# Altium PCB NeuroMother_A.PcbDoc (part 3 of 3)
Units mil, origin at the board's own origin, x right, y up, seen from the top; angles counter-clockwise.
Board outline 11995 x 18500 mil, 2 copper layers (Top Layer, Bottom Layer); 186 components, 92 nets, 510 pads, 3972 vias.
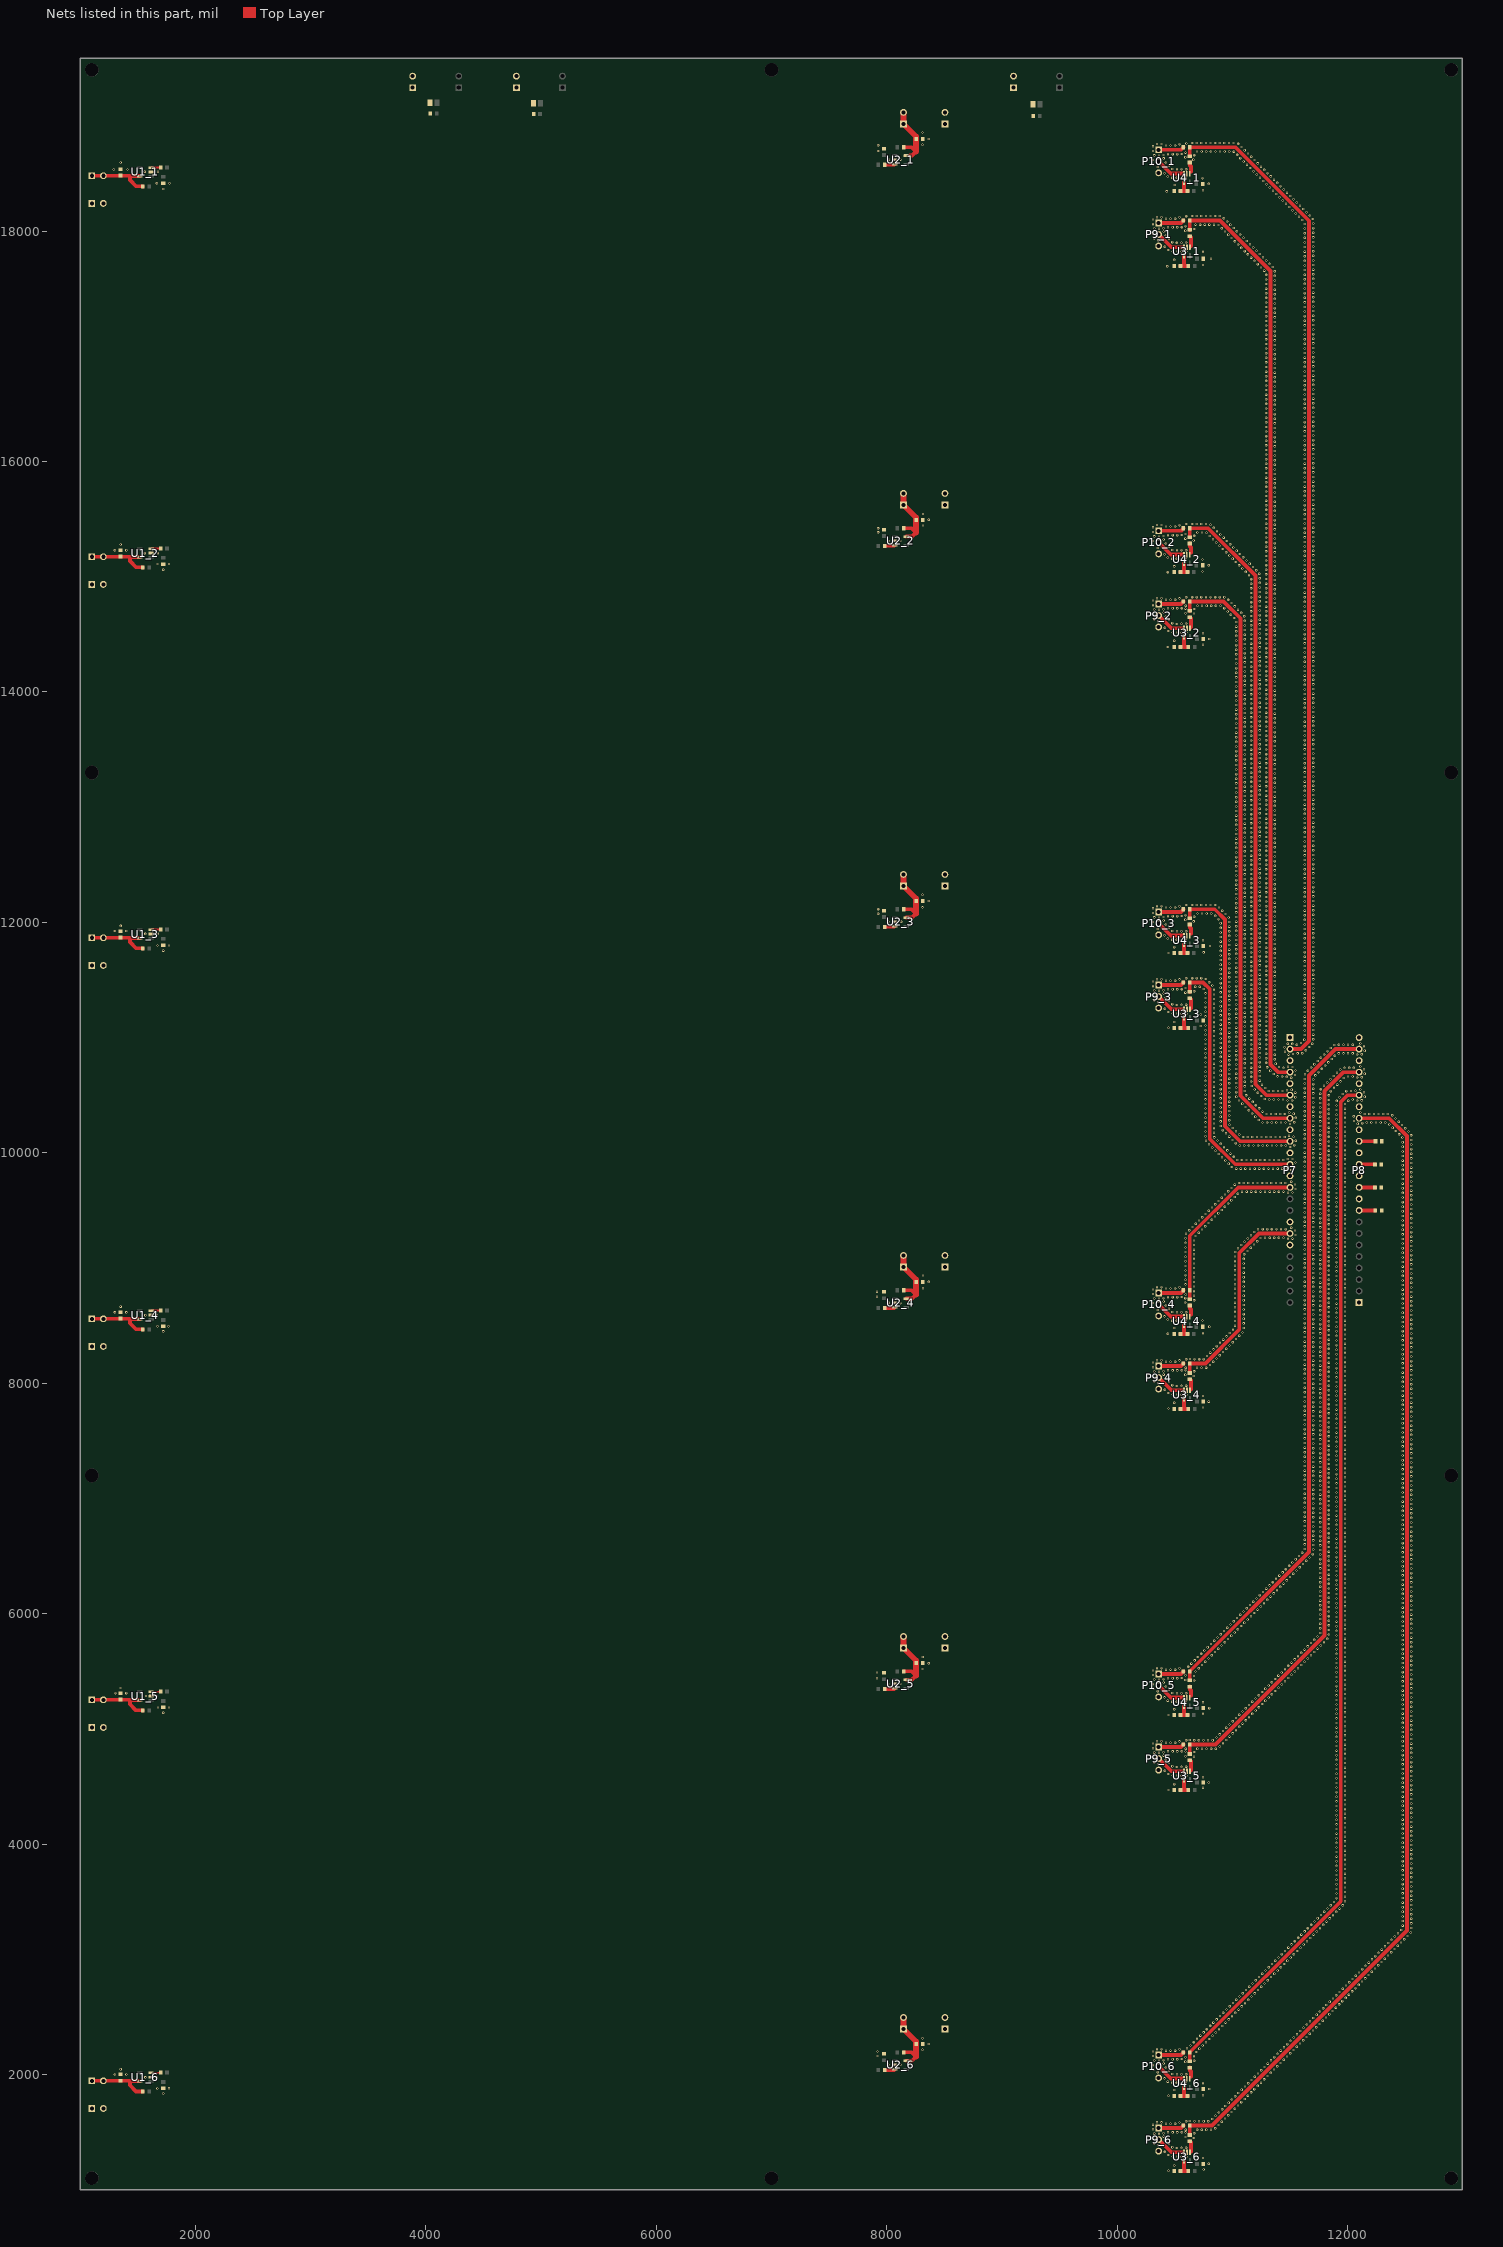
[diagram p3: the nets of this part, all layers, seen from the top]

## Via types
v1: diameter 20, hole 10, Top Layer to Bottom Layer, tented both sides, 3972 vias

## Nets (pads, with @x,y where several pads share a name; then routed paths per layer and width w, separated by ;. In a path a pad name is that pad's centre, name@x,y a point inside that pad or via, vN(x,y) a via of type N, cw(c..) or ccw(c..) an arc to the next point about the centre after c; other vN are vias at no path point) (continued)
GND: (continued)
  other v1: 11627.78,12381.73 11702.22,12385.62 11237.22,12386.68 11032.78,12406.58 11367.22,12411.5 11107.22,12416.87 11162.78,12419.28 11292.78,12420.37 11627.78,12421.73 11702.22,12425.62 11237.22,12426.68 11032.78,12446.58 11367.22,12451.5 11107.22,12456.87 11162.78,12459.28 11292.78,12460.37 11627.78,12461.73 11702.22,12465.62 11237.22,12466.68 11032.78,12486.58 11367.22,12491.5 11107.22,12496.87 11162.78,12499.28 11292.78,12500.37 11627.78,12501.73 11702.22,12505.62 11237.22,12506.68 11032.78,12526.58 11367.22,12531.5 11107.22,12536.87 11162.78,12539.28 11292.78,12540.37 11627.78,12541.73 11702.22,12545.62 11237.22,12546.68 11032.78,12566.58 11367.22,12571.5 11107.22,12576.87 11162.78,12579.28 11292.78,12580.37 11627.78,12581.73 11702.22,12585.62 11237.22,12586.68 11032.78,12606.58 11367.22,12611.5 11107.22,12616.87 11162.78,12619.28 11292.78,12620.37 11627.78,12621.73 11702.22,12625.62 11237.22,12626.68 11032.78,12646.58 11367.22,12651.5 11107.22,12656.87 11162.78,12659.28 11292.78,12660.37 11627.78,12661.73 11702.22,12665.62 11237.22,12666.68 11032.78,12686.58 11367.22,12691.5 11107.22,12696.87 11162.78,12699.28 11292.78,12700.37 11627.78,12701.73 11702.22,12705.62 11237.22,12706.68 11032.78,12726.58 11367.22,12731.5 11107.22,12736.87 11162.78,12739.28 11292.78,12740.37 11627.78,12741.73 11702.22,12745.62 11237.22,12746.68 11032.78,12766.58 11367.22,12771.5 11107.22,12776.87 11162.78,12779.28 11292.78,12780.37 11627.78,12781.73 11702.22,12785.62 11237.22,12786.68 11032.78,12806.58 11367.22,12811.5 11107.22,12816.87 11162.78,12819.28 11292.78,12820.37 11627.78,12821.73 11702.22,12825.62 11237.22,12826.68 11032.78,12846.58 11367.22,12851.5 11107.22,12856.87 11162.78,12859.28 11292.78,12860.37 11627.78,12861.73 11702.22,12865.62 11237.22,12866.68 11032.78,12886.58 11367.22,12891.5 11107.22,12896.87 11162.78,12899.28 11292.78,12900.37 11627.78,12901.73 11702.22,12905.62 11237.22,12906.68 11032.78,12926.58 11367.22,12931.5 11107.22,12936.87 11162.78,12939.28 11292.78,12940.37 11627.78,12941.73 11702.22,12945.62 11237.22,12946.68 11032.78,12966.58 11367.22,12971.5 11107.22,12976.87 11162.78,12979.28 11292.78,12980.37 11627.78,12981.73 11702.22,12985.62 11237.22,12986.68 11032.78,13006.58 11367.22,13011.5 11107.22,13016.87 11162.78,13019.28 11292.78,13020.37 11627.78,13021.73 11702.22,13025.62 11237.22,13026.68 11032.78,13046.58 11367.22,13051.5 11107.22,13056.87 11162.78,13059.28 11292.78,13060.37 11627.78,13061.73 11702.22,13065.62 11237.22,13066.68 11032.78,13086.58 11367.22,13091.5 11107.22,13096.87 11162.78,13099.28 11292.78,13100.37 11627.78,13101.73 11702.22,13105.62 11237.22,13106.68 11032.78,13126.58 11367.22,13131.5 11107.22,13136.87 11162.78,13139.28 11292.78,13140.37 11627.78,13141.73 11702.22,13145.62 11237.22,13146.68 11032.78,13166.58 11367.22,13171.5 11107.22,13176.87 11162.78,13179.28 11292.78,13180.37 11627.78,13181.73 11702.22,13185.62 11237.22,13186.68 11032.78,13206.58 11367.22,13211.5 11107.22,13216.87 11162.78,13219.28 11292.78,13220.37 11627.78,13221.73 11702.22,13225.62 11237.22,13226.68 11032.78,13246.58 11367.22,13251.5 11107.22,13256.87 11162.78,13259.28 11292.78,13260.37 11627.78,13261.73 11702.22,13265.62 11237.22,13266.68 11032.78,13286.58 11367.22,13291.5 11107.22,13296.87 11162.78,13299.28 11292.78,13300.37 11627.78,13301.73 11702.22,13305.62 11237.22,13306.68 11032.78,13326.58 11367.22,13331.5 11107.22,13336.87 11162.78,13339.28 11292.78,13340.37 11627.78,13341.73 11702.22,13345.62 11237.22,13346.68 11032.78,13366.58 11367.22,13371.5 11107.22,13376.87 11162.78,13379.28 11292.78,13380.37 11627.78,13381.73 11702.22,13385.62 11237.22,13386.68 11032.78,13406.58 11367.22,13411.5 11107.22,13416.87 11162.78,13419.28 11292.78,13420.37 11627.78,13421.73 11702.22,13425.62 11237.22,13426.68 11032.78,13446.58 11367.22,13451.5 11107.22,13456.87 11162.78,13459.28 11292.78,13460.37 11627.78,13461.73 11702.22,13465.62 11237.22,13466.68 11032.78,13486.58 11367.22,13491.5 11107.22,13496.87 11162.78,13499.28 11292.78,13500.37 11627.78,13501.73 11702.22,13505.62 11237.22,13506.68 11032.78,13526.58 11367.22,13531.5 11107.22,13536.87 11162.78,13539.28 11292.78,13540.37 11627.78,13541.73 11702.22,13545.62 11237.22,13546.68 11032.78,13566.58 11367.22,13571.5 11107.22,13576.87 11162.78,13579.28 11292.78,13580.37 11627.78,13581.73 11702.22,13585.62 11237.22,13586.68 11032.78,13606.58 11367.22,13611.5 11107.22,13616.87 11162.78,13619.28 11292.78,13620.37 11627.78,13621.73 11702.22,13625.62 11237.22,13626.68 11032.78,13646.58 11367.22,13651.5 11107.22,13656.87 11162.78,13659.28 11292.78,13660.37 11627.78,13661.73 11702.22,13665.62 11237.22,13666.68 11032.78,13686.58 11367.22,13691.5 11107.22,13696.87 11162.78,13699.28 11292.78,13700.37 11627.78,13701.73 11702.22,13705.62 11237.22,13706.68 11032.78,13726.58 11367.22,13731.5 11107.22,13736.87 11162.78,13739.28 11292.78,13740.37 11627.78,13741.73 11702.22,13745.62 11237.22,13746.68 11032.78,13766.58 11367.22,13771.5 11107.22,13776.87 11162.78,13779.28 11292.78,13780.37 11627.78,13781.73 11702.22,13785.62 11237.22,13786.68 11032.78,13806.58 11367.22,13811.5 11107.22,13816.87 11162.78,13819.28 11292.78,13820.37 11627.78,13821.73 11702.22,13825.62 11237.22,13826.68 11032.78,13846.58 11367.22,13851.5 11107.22,13856.87 11162.78,13859.28 11292.78,13860.37 11627.78,13861.73 11702.22,13865.62 11237.22,13866.68 11032.78,13886.58 11367.22,13891.5 11107.22,13896.87 11162.78,13899.28 11292.78,13900.37 11627.78,13901.73 11702.22,13905.62 11237.22,13906.68 11032.78,13926.58 11367.22,13931.5 11107.22,13936.87 11162.78,13939.28 11292.78,13940.37 11627.78,13941.73 11702.22,13945.62 11237.22,13946.68 11032.78,13966.58 11367.22,13971.5 11107.22,13976.87 11162.78,13979.28 11292.78,13980.37 11627.78,13981.73 11702.22,13985.62 11237.22,13986.68 11032.78,14006.58 11367.22,14011.5 11107.22,14016.87 11162.78,14019.28 11292.78,14020.37 11627.78,14021.73 11702.22,14025.62 11237.22,14026.68 11032.78,14046.58 11367.22,14051.5 11107.22,14056.87 11162.78,14059.28 11292.78,14060.37 11627.78,14061.73 11702.22,14065.62 11237.22,14066.68 11032.78,14086.58 11367.22,14091.5 11107.22,14096.87 11162.78,14099.28 11292.78,14100.37 11627.78,14101.73 11702.22,14105.62 11237.22,14106.68 11032.78,14126.58 11367.22,14131.5 11107.22,14136.87 11162.78,14139.28 11292.78,14140.37 11627.78,14141.73 11702.22,14145.62 11237.22,14146.68 11032.78,14166.58 11367.22,14171.5 11107.22,14176.87 11162.78,14179.28 11292.78,14180.37 11627.78,14181.73 11702.22,14185.62 11237.22,14186.68 11032.78,14206.58 11367.22,14211.5 11107.22,14216.87 11162.78,14219.28 11292.78,14220.37 11627.78,14221.73 11702.22,14225.62 11237.22,14226.68 11032.78,14246.58 11367.22,14251.5 11107.22,14256.87 11162.78,14259.28 11292.78,14260.37 11627.78,14261.73 11702.22,14265.62 11237.22,14266.68 11032.78,14286.58 11367.22,14291.5 11107.22,14296.87 11162.78,14299.28 11292.78,14300.37 11627.78,14301.73 11702.22,14305.62 11237.22,14306.68 11032.78,14326.58 11367.22,14331.5 11107.22,14336.87 11162.78,14339.28 11292.78,14340.37 11627.78,14341.73 11702.22,14345.62 11237.22,14346.68 11032.78,14366.58 11367.22,14371.5 11107.22,14376.87 11162.78,14379.28 11292.78,14380.37 11627.78,14381.73 11702.22,14385.62 11237.22,14386.68 10440,14390 11032.78,14406.58 10745,14410 11367.22,14411.5 11107.22,14416.87 11162.78,14419.28 11292.78,14420.37 11627.78,14421.73 11702.22,14425.62 11237.22,14426.68 10495,14445 11032.78,14446.58 11367.22,14451.5 11107.22,14456.87 11162.78,14459.28 10800,14460 11292.78,14460.37 11627.78,14461.73 11702.22,14465.62 11237.22,14466.68 11032.78,14486.58 11367.22,14491.5 11107.22,14496.87 11162.78,14499.28 11292.78,14500.37 11627.78,14501.73 11702.22,14505.62 11237.22,14506.68 10745,14510 10559.7,14514.96 10599.69,14515.34 10479.71,14516.18 10519.71,14516.18 11032.78,14526.58 10441.81,14528.96 11367.22,14531.5 11107.22,14536.87 11162.78,14539.28 11292.78,14540.37 11627.78,14541.73 11702.22,14545.62 11237.22,14546.68 10413.53,14557.24 11032.78,14566.58 11367.22,14571.5 11107.22,14576.87 11162.78,14579.28 11292.78,14580.37 11627.78,14581.73 11702.22,14585.62 11237.22,14586.68 10518.08,14590.62 10558.07,14591.47 10598.03,14593.28 10478.66,14597.37 11032.78,14606.58 11367.22,14611.5 10356.64,14613.49 11107.22,14616.87 11162.78,14619.28 11292.78,14620.37 11627.78,14621.73 10450.37,14625.66 11702.22,14625.62 11237.22,14626.68 10321.18,14631.99 11014.97,14642.4 11367.22,14651.5 10422.09,14653.94 11102.96,14656.65 11162.78,14659.28 11292.78,14660.37 11627.78,14661.73 11702.22,14665.62 11237.22,14666.68 10310.59,14670.57 10986.69,14670.68 10666.72,14680.77 10592.81,14683.15 11076.23,14686.4 10402.82,14688.99 11367.22,14691.5 10958.4,14698.97 11162.78,14699.28 11292.78,14700.37 11627.78,14701.73 11702.22,14705.62 11237.22,14706.68 10362.15,14713.48 10322.19,14715.35 11047.95,14714.68 10401.88,14718.07 10667.81,14720.75 10592.66,14723.15 10441.05,14726.18 10481.05,14726.18 10521.05,14726.18 10561.03,14727.43 10930.12,14727.25 11367.22,14731.5 11162.78,14739.28 11292.78,14740.37 11627.78,14741.73 11019.66,14742.97 11702.22,14745.62 11237.22,14746.68 10594.91,14748.7 10696.39,14748.74 10736.39,14748.74 10776.39,14748.74 10816.39,14748.74 10856.39,14748.74 10896.39,14748.74 10310.08,14753.47 10991.38,14771.25 11367.22,14771.5 11162.78,14779.28 11292.78,14780.37 11627.78,14781.73 11702.22,14785.62 11237.22,14786.68 10310.19,14793.47 10963.09,14799.54 10422.85,14800.62 10462.85,14800.62 10502.85,14800.62 11367.22,14811.5 10344.92,14813.32 10384.92,14813.32 10541.02,14812.57 11162.78,14819.28 11292.78,14820.37 10930.23,14822.34 11627.78,14821.73 10598.43,14822.52 10650.24,14823.17 10690.24,14823.17 10730.24,14823.17 10770.24,14823.17 10810.24,14823.17 10850.24,14823.17 10890.24,14823.17 11702.22,14825.62 11237.22,14826.68 11367.22,14851.5 11162.78,14859.28 11292.78,14860.37 11627.78,14861.73 11702.22,14865.62 11237.22,14866.68 11367.22,14891.5 11162.78,14899.28 11292.78,14900.37 11627.78,14901.73 11702.22,14905.62 11237.22,14906.68 11367.22,14931.5 11162.78,14939.28 11292.78,14940.37 11627.78,14941.73 11702.22,14945.62 11237.22,14946.68 11367.22,14971.5 11162.78,14979.28 11292.78,14980.37 11627.78,14981.73 11702.22,14985.62 11237.22,14986.68 11367.22,15011.5 11143.21,15014.16 11292.78,15020.37 11627.78,15021.73 11233.04,15026.46 11702.22,15025.62 10440,15040 11114.92,15042.45 10740,15045 11367.22,15051.5 11206.36,15056.27 1720,15060 11292.78,15060.37 11627.78,15061.73 11702.22,15065.62 11086.64,15070.73 11178.08,15084.55 10495,15090 11367.22,15091.5 11058.35,15099.02 10795,15100 11292.78,15100.37 11627.78,15101.73 11702.22,15105.62 1670,15110 1770,15110 11149.79,15112.84 11030.07,15127.3 11367.22,15131.5 11292.78,15140.37 11121.51,15141.12 11627.78,15141.73 11702.22,15145.62 10740,15150 10597.91,15152.34 10557.93,15153.54 10478.02,15156.18 10518.02,15156.18 11001.78,15155.59 10439.4,15166.61 11093.22,15169.41 11367.22,15171.5 11292.78,15180.37 11627.78,15181.73 10973.5,15183.87 11702.22,15185.62 10411,15194.77 11064.94,15197.69 1560,15205 1675,15205 11367.22,15211.5 10945.22,15212.15 11292.78,15220.37 11627.78,15221.73 11036.65,15225.98 11702.22,15225.62 1300,15230 1400,15230 10598.62,15230.29 10518.62,15230.62 10558.62,15230.62 10478.66,15232.37 10916.93,15240.44 10352.32,15249.06 11367.22,15251.5 11008.37,15254.26 11292.78,15260.37 10450.37,15260.66 11627.78,15261.73 11702.22,15265.62 10888.65,15268.72 10318.52,15270.46 1350,15280 10980.09,15282.54 10422.09,15288.94 11367.22,15291.5 10860.36,15297.01 11292.78,15300.37 11627.78,15301.73 11702.22,15305.62 8020,15310 8120,15310 10311.37,15309.81 10951.8,15310.83 10663.2,15314.95 10402.82,15323.99 10832.08,15325.29 10591.89,15330.98 11367.22,15331.5 10923.52,15339.11 11292.78,15340.37 11627.78,15341.73 11702.22,15345.62 10362.15,15348.48 10322.19,15350.35 10401.88,15353.07 10803.79,15353.58 10668.11,15354.65 10441.05,15361.18 10481.05,15361.18 10521.05,15361.18 10561.03,15362.43 10895.23,15367.4 10592.78,15370.97 11367.22,15371.5 11292.78,15380.37 10775.51,15381.86 11627.78,15381.73 10695.55,15383.74 10735.55,15383.74 7925,15385 11702.22,15385.62 10310.08,15388.47 10866.95,15395.68 11367.22,15411.5 7925,15420 11292.78,15420.37 11627.78,15421.73 10838.66,15423.97 11702.22,15425.62 10310.19,15428.47 10422.85,15435.62 10462.85,15435.62 10502.85,15435.62 8315,15445 10344.92,15448.32 10384.92,15448.32 10541.02,15447.57 11367.22,15451.5 10809.68,15451.54 10598.43,15457.52 10650.24,15458.17 10690.24,15458.17 10730.24,15458.17 10770.24,15458.17 11292.78,15460.37 11627.78,15461.73 11702.22,15465.62 11367.22,15491.5 8365,15495 11292.78,15500.37 11627.78,15501.73 11702.22,15505.62 11367.22,15531.5 11292.78,15540.37 11627.78,15541.73 8315,15545 11702.22,15545.62 11367.22,15571.5 11292.78,15580.37 11627.78,15581.73 11702.22,15585.62 11367.22,15611.5 11292.78,15620.37 11627.78,15621.73 11702.22,15625.62 11367.22,15651.5 11292.78,15660.37 11627.78,15661.73 11702.22,15665.62 11367.22,15691.5 11292.78,15700.37 11627.78,15701.73 11702.22,15705.62 11367.22,15731.5 11292.78,15740.37 11627.78,15741.73 11702.22,15745.62 11367.22,15771.5 11292.78,15780.37 11627.78,15781.73 11702.22,15785.62 11367.22,15811.5 11292.78,15820.37 11627.78,15821.73 11702.22,15825.62 11367.22,15851.5 11292.78,15860.37 11627.78,15861.73 11702.22,15865.62 11367.22,15891.5 11292.78,15900.37 11627.78,15901.73 11702.22,15905.62 11367.22,15931.5 11292.78,15940.37 11627.78,15941.73 11702.22,15945.62 11367.22,15971.5 11292.78,15980.37 11627.78,15981.73 11702.22,15985.62 11367.22,16011.5 11292.78,16020.37 11627.78,16021.73 11702.22,16025.62 11367.22,16051.5 11292.78,16060.37 11627.78,16061.73 11702.22,16065.62 11367.22,16091.5 11292.78,16100.37 11627.78,16101.73 11702.22,16105.62 11367.22,16131.5 11292.78,16140.37 11627.78,16141.73 11702.22,16145.62 11367.22,16171.5 11292.78,16180.37 11627.78,16181.73 11702.22,16185.62 11367.22,16211.5 11292.78,16220.37 11627.78,16221.73 11702.22,16225.62 11367.22,16251.5 11292.78,16260.37 11627.78,16261.73 11702.22,16265.62 11367.22,16291.5 11292.78,16300.37 11627.78,16301.73 11702.22,16305.62 11367.22,16331.5 11292.78,16340.37 11627.78,16341.73 11702.22,16345.62 11367.22,16371.5 11292.78,16380.37 11627.78,16381.73 11702.22,16385.62 11367.22,16411.5 11292.78,16420.37 11627.78,16421.73 11702.22,16425.62 11367.22,16451.5 11292.78,16460.37 11627.78,16461.73 11702.22,16465.62 11367.22,16491.5 11292.78,16500.37 11627.78,16501.73 11702.22,16505.62 11367.22,16531.5 11292.78,16540.37 11627.78,16541.73 11702.22,16545.62 11367.22,16571.5 11292.78,16580.37 11627.78,16581.73 11702.22,16585.62 11367.22,16611.5 11292.78,16620.37 11627.78,16621.73 11702.22,16625.62 11367.22,16651.5 11292.78,16660.37 11627.78,16661.73 11702.22,16665.62 11367.22,16691.5 11292.78,16700.37 11627.78,16701.73 11702.22,16705.62 11367.22,16731.5 11292.78,16740.37 11627.78,16741.73 11702.22,16745.62 11367.22,16771.5 11292.78,16780.37 11627.78,16781.73 11702.22,16785.62 11367.22,16811.5 11292.78,16820.37 11627.78,16821.73 11702.22,16825.62 11367.22,16851.5 11292.78,16860.37 11627.78,16861.73 11702.22,16865.62 11367.22,16891.5 11292.78,16900.37 11627.78,16901.73 11702.22,16905.62 11367.22,16931.5 11292.78,16940.37 11627.78,16941.73 11702.22,16945.62 11367.22,16971.5 11292.78,16980.37 11627.78,16981.73 11702.22,16985.62 11367.22,17011.5 11292.78,17020.37 11627.78,17021.73 11702.22,17025.62 11367.22,17051.5 11292.78,17060.37 11627.78,17061.73 11702.22,17065.62 11367.22,17091.5 11292.78,17100.37 11627.78,17101.73 11702.22,17105.62 11367.22,17131.5 11292.78,17140.37 11627.78,17141.73 11702.22,17145.62 11367.22,17171.5 11292.78,17180.37 11627.78,17181.73 11702.22,17185.62 11367.22,17211.5 11292.78,17220.37 11627.78,17221.73 11702.22,17225.62 11367.22,17251.5 11292.78,17260.37 11627.78,17261.73 11702.22,17265.62 11367.22,17291.5 11292.78,17300.37 11627.78,17301.73 11702.22,17305.62 11367.22,17331.5 11292.78,17340.37 11627.78,17341.73 11702.22,17345.62 11367.22,17371.5 11292.78,17380.37 11627.78,17381.73 11702.22,17385.62 11367.22,17411.5 11292.78,17420.37 11627.78,17421.73 11702.22,17425.62 11367.22,17451.5 11292.78,17460.37 11627.78,17461.73 11702.22,17465.62 11367.22,17491.5 11292.78,17500.37 11627.78,17501.73 11702.22,17505.62 11367.22,17531.5 11292.78,17540.37 11627.78,17541.73 11702.22,17545.62 11367.22,17571.5 11292.78,17580.37 11627.78,17581.73 11702.22,17585.62 11367.22,17611.5 11292.78,17620.37 11627.78,17621.73 11702.22,17625.62 11367.22,17651.5 11275.79,17656.58 11627.78,17661.73 11702.22,17665.62 11247.51,17684.86 11350.02,17687.61 10435,17695 11627.78,17701.73 10745,17705 11702.22,17705.62 11219.22,17713.15 11321.74,17715.89 11190.94,17741.43 11627.78,17741.73 11293.45,17744.18 11702.22,17745.62 10495,17750 10815,17760 11162.65,17769.72 11265.17,17772.46 11627.78,17781.73 11702.22,17785.62 11134.37,17798 11236.88,17800.75 10745,17820 10559.7,17822.06 10599.69,17822.44 11627.78,17821.73 10479.71,17823.28 10519.71,17823.28 11106.09,17826.28 11702.22,17825.62 11208.6,17829.03 10441.81,17836.06 11077.8,17854.57 11180.31,17857.32 11627.78,17861.73 10413.53,17864.34 11702.22,17865.62 11049.52,17882.85 11152.03,17885.6 10518.08,17897.72 10558.07,17898.57 10598.03,17900.38 11627.78,17901.73 10478.66,17904.47 11702.22,17905.62 11021.23,17911.14 11123.75,17913.88 10356.64,17920.59 10450.37,17932.76 10321.18,17939.09 10992.95,17939.42 11095.46,17942.17 11627.78,17941.73 11702.22,17945.62 10422.09,17961.04 10964.66,17967.71 11067.18,17970.45 10310.59,17977.67 11627.78,17981.73 11702.22,17985.62 10402.82,17996.09 10936.38,17995.99 11038.89,17998.74 10591.89,18003.34 10668.11,18017.64 10362.15,18020.58 10322.19,18022.45 11627.78,18021.73 10908.1,18024.27 10401.88,18025.17 11702.22,18025.62 11010.61,18027.02 10441.05,18033.28 10481.05,18033.28 10521.05,18033.28 10561.03,18034.53 10592.78,18043.33 10879.81,18052.56 10982.32,18055.31 10679.95,18055.84 10719.95,18055.84 10759.95,18055.84 10799.95,18055.84 10839.95,18055.84 10310.08,18060.57 11627.78,18061.73 11702.22,18065.62 10954.04,18083.59 11606.67,18095.7 10310.19,18100.57 11698.46,18105.44 10422.85,18107.72 10462.85,18107.72 10502.85,18107.72 10925.76,18111.87 10344.92,18120.42 10384.92,18120.42 10541.02,18119.67 11578.38,18123.99 10598.43,18129.62 10650.24,18130.27 10690.24,18130.27 10730.24,18130.27 10770.24,18130.27 10810.24,18130.27 10850.24,18130.27 10890.24,18130.27 11672.1,18135.53 11550.1,18152.27 11643.82,18163.81 11521.81,18180.56 11615.53,18192.1 11493.53,18208.84 11587.25,18220.38 11465.25,18237.12 11558.96,18248.67 11436.96,18265.41 11530.68,18276.95 11408.68,18293.69 11502.39,18305.24 11380.39,18321.98 11474.11,18333.52 10430,18345 11352.11,18350.26 10745,18355 11445.83,18361.8 1720,18365 11323.82,18378.55 11417.54,18390.09 10500,18400 11295.54,18406.83 10795,18410 1665,18415 1775,18415 11389.26,18418.37 11267.26,18435.11 11360.97,18446.66 10597.91,18459.44 10740,18460 10557.93,18460.64 10478.02,18463.28 10518.02,18463.28 11238.97,18463.4 10439.4,18473.71 11332.69,18474.94 11210.69,18491.68 10411,18501.87 11304.4,18503.23 1560,18515 1675,18515 11182.4,18519.97 11276.12,18531.51 1290,18535 1410,18535 10598.62,18537.39 10518.62,18537.72 10558.62,18537.72 10478.66,18539.47 11154.12,18548.25 10352.32,18556.16 11247.84,18559.79 10450.37,18567.76 11125.83,18576.54 10318.52,18577.56 11219.55,18588.08 1350,18595 10422.09,18596.04 11097.55,18604.82 11191.27,18616.36 10311.37,18616.91 8020,18620 8120,18620 10661.3,18619.89 10402.82,18631.09 11069.27,18633.1 10591.89,18641.19 11162.98,18644.65 10362.15,18655.58 10322.19,18657.45 10668.11,18659.31 10401.88,18660.17 11040.98,18661.39 10441.05,18668.28 10481.05,18668.28 10521.05,18668.28 10561.03,18669.53 11134.7,18672.93 10592.78,18681.18 11012.7,18689.67 10692.71,18690.84 10732.71,18690.84 10772.71,18690.84 10812.71,18690.84 10852.71,18690.84 10892.71,18690.84 10932.71,18690.84 10972.71,18690.84 7925,18695 10310.08,18695.57 11106.41,18701.22 11078.13,18729.5 10310.19,18735.57 10422.85,18742.72 10462.85,18742.72 10502.85,18742.72 7925,18745 8310,18750 10344.92,18755.42 10384.92,18755.42 10541.02,18754.67 11049.45,18757.39 10600.25,18760.48 10650.24,18765.27 10690.24,18765.27 10730.24,18765.27 10770.24,18765.27 10810.24,18765.27 10850.24,18765.27 10890.24,18765.27 10930.24,18765.27 10970.24,18765.27 11010.24,18765.27 8365,18800 8310,18855
NetC1_1_2: C1_1.2 P1_1.1 P1_1.2 R3_1.2 U1_1.5 | length 586.6
  Top Layer w15: U1_1.5@1513.17,18478.08 U1_1.5@1515.59,18475.66
  Top Layer w33: P1_1.1@1100,18480.5 P1_1.2@1200,18480.5 1430,18480.5 1430.55,18479.95 1430.55,18442.51 1483.78,18389.28 1541.69,18389.28 1542.44,18388.52 R3_1.2@1542.44,18388.06 ; 1432.89,18478.08 U1_1.5@1513.17,18478.08
NetC1_2_2: C1_2.2 P1_2.1 P1_2.2 R3_2.2 U1_2.5 | length 586.6
  Top Layer w15: U1_2.5@1513.17,15170.98 U1_2.5@1515.59,15168.56
  Top Layer w33: P1_2.1@1100,15173.4 P1_2.2@1200,15173.4 1430,15173.4 1430.55,15172.85 1430.55,15135.41 1483.78,15082.18 1541.69,15082.18 1542.44,15081.42 R3_2.2@1542.44,15080.96 ; 1432.89,15170.98 U1_2.5@1513.17,15170.98
NetC1_3_2: C1_3.2 P1_3.1 P1_3.2 R3_3.2 U1_3.5 | length 586.6
  Top Layer w15: U1_3.5@1513.17,11863.88 U1_3.5@1515.59,11861.46
  Top Layer w33: P1_3.1@1100,11866.3 P1_3.2@1200,11866.3 1430,11866.3 1430.55,11865.75 1430.55,11828.31 1483.78,11775.08 1541.69,11775.08 1542.44,11774.32 R3_3.2@1542.44,11773.86 ; 1432.89,11863.88 U1_3.5@1513.17,11863.88
NetC1_4_2: C1_4.2 P1_4.1 P1_4.2 R3_4.2 U1_4.5 | length 586.6
  Top Layer w15: U1_4.5@1513.17,8556.78 U1_4.5@1515.59,8554.36
  Top Layer w33: P1_4.1@1100,8559.2 P1_4.2@1200,8559.2 1430,8559.2 1430.55,8558.65 1430.55,8521.21 1483.78,8467.98 1541.69,8467.98 1542.44,8467.22 R3_4.2@1542.44,8466.76 ; 1432.89,8556.78 U1_4.5@1513.17,8556.78
NetC1_5_2: C1_5.2 P1_5.1 P1_5.2 R3_5.2 U1_5.5 | length 586.6
  Top Layer w15: U1_5.5@1513.17,5249.68 U1_5.5@1515.59,5247.26
  Top Layer w33: P1_5.1@1100,5252.1 P1_5.2@1200,5252.1 1430,5252.1 1430.55,5251.55 1430.55,5214.11 1483.78,5160.88 1541.69,5160.88 1542.44,5160.12 R3_5.2@1542.44,5159.66 ; 1432.89,5249.68 U1_5.5@1513.17,5249.68
NetC1_6_2: C1_6.2 P1_6.1 P1_6.2 R3_6.2 U1_6.5 | length 586.6
  Top Layer w15: U1_6.5@1513.17,1942.58 U1_6.5@1515.59,1940.16
  Top Layer w33: P1_6.1@1100,1945 P1_6.2@1200,1945 1430,1945 1430.55,1944.45 1430.55,1907.01 1483.78,1853.78 1541.69,1853.78 1542.44,1853.02 R3_6.2@1542.44,1852.56 ; 1432.89,1942.58 U1_6.5@1513.17,1942.58
NetC3_1_2: C3_1.2 P2_1.1 P2_1.2 R4_1.2 U2_1.5 | length 599.5
  Top Layer w33: R4_1.2@8147.56,18728.06 8215.67,18728.06 8228.54,18715.18 ; 8200,18655.46 8219.3,18655.46 8253.78,18689.94 8228.54,18715.18 ; 8245.41,18732.05 8228.54,18715.18
  Top Layer w50: P2_1.2@8145,19030.5 P2_1.1@8145,18930.5 8253.78,18821.72 8253.78,18689.94
NetC3_2_2: C3_2.2 P2_2.1 P2_2.2 R4_2.2 U2_2.5 | length 630.7
  Top Layer w33: R4_2.2@8147.56,15420.96 8215.67,15420.96 8228.54,15408.08 ; U2_2.5@8168.82,15348.36 8219.3,15348.36 8253.78,15382.84 8228.54,15408.08 ; 8245.41,15424.95 8228.54,15408.08
  Top Layer w50: P2_2.2@8145,15723.4 P2_2.1@8145,15623.4 8253.78,15514.62 8253.78,15424.95 8253.78,15382.84
NetC3_3_2: C3_3.2 P2_3.1 P2_3.2 R4_3.2 U2_3.5 | length 630.7
  Top Layer w33: R4_3.2@8147.56,12113.86 8215.67,12113.86 8228.54,12100.98 ; U2_3.5@8168.82,12041.26 8219.3,12041.26 8253.78,12075.74 8228.54,12100.98 ; 8245.41,12117.85 8228.54,12100.98
  Top Layer w50: P2_3.2@8145,12416.3 P2_3.1@8145,12316.3 8253.78,12207.52 8253.78,12117.85 8253.78,12075.74
NetC3_4_2: C3_4.2 P2_4.1 P2_4.2 R4_4.2 U2_4.5 | length 630.7
  Top Layer w33: R4_4.2@8147.56,8806.76 8215.67,8806.76 8228.54,8793.88 ; U2_4.5@8168.82,8734.16 8219.3,8734.16 8253.78,8768.64 8228.54,8793.88 ; 8245.41,8810.75 8228.54,8793.88
  Top Layer w50: P2_4.2@8145,9109.2 P2_4.1@8145,9009.2 8253.78,8900.42 8253.78,8810.75 8253.78,8768.64
NetC3_5_2: C3_5.2 P2_5.1 P2_5.2 R4_5.2 U2_5.5 | length 630.7
  Top Layer w33: R4_5.2@8147.56,5499.66 8215.67,5499.66 8228.54,5486.78 ; U2_5.5@8168.82,5427.06 8219.3,5427.06 8253.78,5461.54 8228.54,5486.78 ; 8245.41,5503.65 8228.54,5486.78
  Top Layer w50: P2_5.2@8145,5802.1 P2_5.1@8145,5702.1 8253.78,5593.32 8253.78,5503.65 8253.78,5461.54
NetC3_6_2: C3_6.2 P2_6.1 P2_6.2 R4_6.2 U2_6.5 | length 630.7
  Top Layer w33: R4_6.2@8147.56,2192.56 8215.67,2192.56 8228.54,2179.68 ; U2_6.5@8168.82,2119.96 8219.3,2119.96 8253.78,2154.44 8228.54,2179.68 ; 8245.41,2196.55 8228.54,2179.68
  Top Layer w50: P2_6.2@8145,2495 P2_6.1@8145,2395 8253.78,2286.22 8253.78,2196.55 8253.78,2154.44
NetP8_9: P8.9 R8.1 | length 140
  Top Layer w33: P8.9@12100,9500 R8.1@12240,9500
NetP8_11: P8.11 R7.1 | length 137.4
  Top Layer w33: P8.11@12100,9700 R7.1@12237.44,9700
NetP8_13: P8.13 R6.1 | length 137.4
  Top Layer w33: P8.13@12100,9900 R6.1@12237.44,9900
NetP8_15: P8.15 R5.1 | length 135.3
  Top Layer w33: P8.15@12100,10100 R5.1@12235.35,10100
NetP10_1_1: P10_1.1 R14_1.2 | length 224.5
  Top Layer w33: P10_1.1@10360,18705.5 10552.79,18705.5 10574.88,18727.59 R14_1.2@10574.88,18728.06
NetP10_2_1: P10_2.1 R14_2.2 | length 224.5
  Top Layer w33: P10_2.1@10360,15398.4 10552.79,15398.4 10574.88,15420.49 R14_2.2@10574.88,15420.96
NetP10_3_1: P10_3.1 R14_3.2 | length 224.5
  Top Layer w33: P10_3.1@10360,12091.3 10552.79,12091.3 10574.88,12113.39 R14_3.2@10574.88,12113.86
NetP10_4_1: P10_4.1 R14_4.2 | length 224.5
  Top Layer w33: P10_4.1@10360,8784.2 10552.79,8784.2 10574.88,8806.29 R14_4.2@10574.88,8806.76
NetP10_5_1: P10_5.1 R14_5.2 | length 224.5
  Top Layer w33: P10_5.1@10360,5477.1 10552.79,5477.1 10574.88,5499.19 R14_5.2@10574.88,5499.66
NetP10_6_1: P10_6.1 R14_6.2 | length 224.5
  Top Layer w33: P10_6.1@10360,2170 10552.79,2170 10574.88,2192.09 R14_6.2@10574.88,2192.56
NetR1_1_2: R1_1.2 U1_1.3 | length 84.1
  Top Layer w15: U1_1.3@1614.41,18550.46 1615.71,18551.76 1696.14,18551.76 R1_1.2@1697.44,18553.06
NetR1_2_2: R1_2.2 U1_2.3 | length 84.1
  Top Layer w15: U1_2.3@1614.41,15243.36 1615.71,15244.66 1696.14,15244.66 R1_2.2@1697.44,15245.96
NetR1_3_2: R1_3.2 U1_3.3 | length 84.1
  Top Layer w15: U1_3.3@1614.41,11936.26 1615.71,11937.56 1696.14,11937.56 R1_3.2@1697.44,11938.86
NetR1_4_2: R1_4.2 U1_4.3 | length 84.1
  Top Layer w15: U1_4.3@1614.41,8629.16 1615.71,8630.46 1696.14,8630.46 R1_4.2@1697.44,8631.76
NetR1_5_2: R1_5.2 U1_5.3 | length 84.1
  Top Layer w15: U1_5.3@1614.41,5322.06 1615.71,5323.36 1696.14,5323.36 R1_5.2@1697.44,5324.66
NetR1_6_2: R1_6.2 U1_6.3 | length 84.1
  Top Layer w15: U1_6.3@1614.41,2014.96 1615.71,2016.26 1696.14,2016.26 R1_6.2@1697.44,2017.56
NetR2_1_2: R2_1.2 U2_1.3 | length 79.9
  Top Layer w33: R2_1.2@7982.56,18575.5 U2_1.3@8062.41,18575.5
NetR2_2_2: R2_2.2 U2_2.3 | length 79.9
  Top Layer w33: R2_2.2@7982.56,15268.4 U2_2.3@8062.41,15268.4
NetR2_3_2: R2_3.2 U2_3.3 | length 79.9
  Top Layer w33: R2_3.2@7982.56,11961.3 U2_3.3@8062.41,11961.3
NetR2_4_2: R2_4.2 U2_4.3 | length 79.9
  Top Layer w33: R2_4.2@7982.56,8654.2 U2_4.3@8062.41,8654.2
NetR2_5_2: R2_5.2 U2_5.3 | length 79.9
  Top Layer w33: R2_5.2@7982.56,5347.1 U2_5.3@8062.41,5347.1
NetR2_6_2: R2_6.2 U2_6.3 | length 79.9
  Top Layer w33: R2_6.2@7982.56,2040 U2_6.3@8062.41,2040
NetR9_1_1: R9_1.1 R10_1.2 U3_1.4 | length 154.5
  Top Layer w33: R10_1.2@10550,17698.06 10550.59,17698.65 10579.41,17698.65 ; U3_1.4@10579.41,17785.26 10579.41,17698.65 ; R9_1.1@10617.44,17698.06 10580,17698.06 10579.41,17698.65
NetR9_2_1: R9_2.1 R10_2.2 U3_2.4 | length 154.5
  Top Layer w33: R10_2.2@10550,14390.96 10550.59,14391.55 10579.41,14391.55 ; U3_2.4@10579.41,14478.16 10579.41,14391.55 ; R9_2.1@10617.44,14390.96 10580,14390.96 10579.41,14391.55
NetR9_3_1: R9_3.1 R10_3.2 U3_3.4 | length 154.5
  Top Layer w33: R10_3.2@10550,11083.86 10550.59,11084.45 10579.41,11084.45 ; U3_3.4@10579.41,11171.06 10579.41,11084.45 ; R9_3.1@10617.44,11083.86 10580,11083.86 10579.41,11084.45
NetR9_4_1: R9_4.1 R10_4.2 U3_4.4 | length 154.5
  Top Layer w33: R10_4.2@10550,7776.76 10550.59,7777.35 10579.41,7777.35 ; U3_4.4@10579.41,7863.96 10579.41,7777.35 ; R9_4.1@10617.44,7776.76 10580,7776.76 10579.41,7777.35
NetR9_5_1: R9_5.1 R10_5.2 U3_5.4 | length 154.5
  Top Layer w33: R10_5.2@10550,4469.66 10550.59,4470.25 10579.41,4470.25 ; U3_5.4@10579.41,4556.86 10579.41,4470.25 ; R9_5.1@10617.44,4469.66 10580,4469.66 10579.41,4470.25
NetR9_6_1: R9_6.1 R10_6.2 U3_6.4 | length 154.5
  Top Layer w33: R10_6.2@10550,1162.56 10550.59,1163.15 10579.41,1163.15 ; U3_6.4@10579.41,1249.76 10579.41,1163.15 ; R9_6.1@10617.44,1162.56 10580,1162.56 10579.41,1163.15
NetR11_1_1: R11_1.1 R12_1.2 U4_1.4 | length 140.6
  Top Layer w33: R12_1.2@10550,18348.06 10592.44,18348.06 ; U4_1.4@10578.82,18423.06 10578.82,18361.68 10592.44,18348.06 ; R11_1.1@10610,18348.06 10592.44,18348.06
NetR11_2_1: R11_2.1 R12_2.2 U4_2.4 | length 140.6
  Top Layer w33: R12_2.2@10550,15040.96 10592.44,15040.96 ; U4_2.4@10578.82,15115.96 10578.82,15054.58 10592.44,15040.96 ; R11_2.1@10610,15040.96 10592.44,15040.96
NetR11_3_1: R11_3.1 R12_3.2 U4_3.4 | length 140.6
  Top Layer w33: R12_3.2@10550,11733.86 10592.44,11733.86 ; U4_3.4@10578.82,11808.86 10578.82,11747.48 10592.44,11733.86 ; R11_3.1@10610,11733.86 10592.44,11733.86
NetR11_4_1: R11_4.1 R12_4.2 U4_4.4 | length 140.6
  Top Layer w33: R12_4.2@10550,8426.76 10592.44,8426.76 ; U4_4.4@10578.82,8501.76 10578.82,8440.38 10592.44,8426.76 ; R11_4.1@10610,8426.76 10592.44,8426.76
NetR11_5_1: R11_5.1 R12_5.2 U4_5.4 | length 140.6
  Top Layer w33: R12_5.2@10550,5119.66 10592.44,5119.66 ; U4_5.4@10578.82,5194.66 10578.82,5133.28 10592.44,5119.66 ; R11_5.1@10610,5119.66 10592.44,5119.66
NetR11_6_1: R11_6.1 R12_6.2 U4_6.4 | length 140.6
  Top Layer w33: R12_6.2@10550,1812.56 10592.44,1812.56 ; U4_6.4@10578.82,1887.56 10578.82,1826.18 10592.44,1812.56 ; R11_6.1@10610,1812.56 10592.44,1812.56
NetR15_1_2: R15_1.2 U3_1.1 | length 92.5
  Top Layer w33: R15_1.2@10630,17955.5 10630.46,17955.5 10640,17945.96 10640,17868.56 10639.22,17867.78
NetR15_2_2: R15_2.2 U3_2.1 | length 92.5
  Top Layer w33: R15_2.2@10630,14648.4 10630.46,14648.4 10640,14638.86 10640,14561.46 10639.22,14560.68
NetR15_3_2: R15_3.2 U3_3.1 | length 92.5
  Top Layer w33: R15_3.2@10630,11341.3 10630.46,11341.3 10640,11331.76 10640,11254.36 10639.22,11253.58
NetR15_4_2: R15_4.2 U3_4.1 | length 92.5
  Top Layer w33: R15_4.2@10630,8034.2 10630.46,8034.2 10640,8024.66 10640,7947.26 10639.22,7946.48
NetR15_5_2: R15_5.2 U3_5.1 | length 92.5
  Top Layer w33: R15_5.2@10630,4727.1 10630.46,4727.1 10640,4717.56 10640,4640.16 10639.22,4639.38
NetR15_6_2: R15_6.2 U3_6.1 | length 92.5
  Top Layer w33: R15_6.2@10630,1420 10630.46,1420 10640,1410.46 10640,1333.06 10639.22,1332.28
NetR16_1_2: R16_1.2 U4_1.1 | length 81.9
  Top Layer w33: R16_1.2@10630,18595.5 10630.46,18595.5 10631.22,18594.75 10631.22,18569.28 10640,18560.5 10640,18517.99
NetR16_2_2: R16_2.2 U4_2.1 | length 81.9
  Top Layer w33: R16_2.2@10630,15288.4 10630.46,15288.4 10631.22,15287.65 10631.22,15262.18 10640,15253.4 10640,15210.89
NetR16_3_2: R16_3.2 U4_3.1 | length 81.9
  Top Layer w33: R16_3.2@10630,11981.3 10630.46,11981.3 10631.22,11980.55 10631.22,11955.08 10640,11946.3 10640,11903.79
NetR16_4_2: R16_4.2 U4_4.1 | length 81.9
  Top Layer w33: R16_4.2@10630,8674.2 10630.46,8674.2 10631.22,8673.45 10631.22,8647.98 10640,8639.2 10640,8596.69
NetR16_5_2: R16_5.2 U4_5.1 | length 81.9
  Top Layer w33: R16_5.2@10630,5367.1 10630.46,5367.1 10631.22,5366.35 10631.22,5340.88 10640,5332.1 10640,5289.59
NetR16_6_2: R16_6.2 U4_6.1 | length 81.9
  Top Layer w33: R16_6.2@10630,2060 10630.46,2060 10631.22,2059.25 10631.22,2033.78 10640,2025 10640,1982.49
spike_1_n: P10_1.2 U4_1.3 | length 248.5
  Top Layer w33: P10_1.2@10360,18605.5 10465,18500.5 10565,18500.5
spike_1_p: P9_1.2 U3_1.3 | length 255.6
  Top Layer w33: P9_1.2@10360,17970.5 10470,17860.5 10570,17860.5
spike_2_n: P10_2.2 U4_2.3 | length 248.5
  Top Layer w33: P10_2.2@10360,15298.4 10465,15193.4 10565,15193.4
spike_2_p: P9_2.2 U3_2.3 | length 255.6
  Top Layer w33: P9_2.2@10360,14663.4 10470,14553.4 10570,14553.4
spike_3_n: P10_3.2 U4_3.3 | length 248.5
  Top Layer w33: P10_3.2@10360,11991.3 10465,11886.3 10565,11886.3
spike_3_p: P9_3.2 U3_3.3 | length 255.6
  Top Layer w33: P9_3.2@10360,11356.3 10470,11246.3 10570,11246.3
spike_4_n: P10_4.2 U4_4.3 | length 248.5
  Top Layer w33: P10_4.2@10360,8684.2 10465,8579.2 10565,8579.2
spike_4_p: P9_4.2 U3_4.3 | length 255.6
  Top Layer w33: P9_4.2@10360,8049.2 10470,7939.2 10570,7939.2
spike_5_n: P10_5.2 U4_5.3 | length 248.5
  Top Layer w33: P10_5.2@10360,5377.1 10465,5272.1 10565,5272.1
spike_5_p: P9_5.2 U3_5.3 | length 255.6
  Top Layer w33: P9_5.2@10360,4742.1 10470,4632.1 10570,4632.1
spike_6_n: P10_6.2 U4_6.3 | length 248.5
  Top Layer w33: P10_6.2@10360,2070 10465,1965 10565,1965
spike_6_p: P9_6.2 U3_6.3 | length 255.6
  Top Layer w33: P9_6.2@10360,1435 10470,1325 10570,1325
spike_p_prb_1: P9_1.1 R13_1.2 | length 224.5
  Top Layer w33: P9_1.1@10360,18070.5 10552.79,18070.5 10574.88,18092.59 R13_1.2@10574.88,18093.06
spike_p_prb_2: P9_2.1 R13_2.2 | length 224.5
  Top Layer w33: P9_2.1@10360,14763.4 10552.79,14763.4 10574.88,14785.49 R13_2.2@10574.88,14785.96
spike_p_prb_3: P9_3.1 R13_3.2 | length 224.5
  Top Layer w33: P9_3.1@10360,11456.3 10552.79,11456.3 10574.88,11478.39 R13_3.2@10574.88,11478.86
spike_p_prb_4: P9_4.1 R13_4.2 | length 224.5
  Top Layer w33: P9_4.1@10360,8149.2 10552.79,8149.2 10574.88,8171.29 R13_4.2@10574.88,8171.76
spike_p_prb_5: P9_5.1 R13_5.2 | length 224.5
  Top Layer w33: P9_5.1@10360,4842.1 10552.79,4842.1 10574.88,4864.19 R13_5.2@10574.88,4864.66
spike_p_prb_6: P9_6.1 R13_6.2 | length 224.5
  Top Layer w33: P9_6.1@10360,1535 10552.79,1535 10574.88,1557.09 R13_6.2@10574.88,1557.56
SPK_0: P7.2 R14_1.1 R16_1.1 | length 8690.7
  Top Layer w33: R16_1.1@10630,18650.62 R14_1.1@10630,18728.06 11026.94,18728.06 11665,18090 11665,10970 11595,10900 P7.2@11500,10900
SPK_1: P7.4 R13_1.1 R15_1.1 | length 8050.8
  Top Layer w33: R15_1.1@10630,18010.62 R13_1.1@10630,18093.06 10891.94,18093.06 11330,17655 11330,10765 11395,10700 P7.4@11500,10700
SPK_2: P7.6 R14_2.1 R16_2.1 | length 5572
  Top Layer w33: R16_2.1@10630,15343.52 10630,15420.49 R14_2.1@10630,15420.96 10789.04,15420.96 11200,15010 11200,10595 11295,10500 P7.6@11500,10500
SPK_3: P7.8 R13_2.1 R15_2.1 | length 5238.7
  Top Layer w33: R15_2.1@10630,14703.52 R13_2.1@10630,14785.96 10924.04,14785.96 11070,14640 11070,10495 11265,10300 P7.8@11500,10300
SPK_4: P7.10 R14_3.1 R16_3.1 | length 2833.1
  Top Layer w33: R16_3.1@10630,12036.42 R14_3.1@10630,12113.86 10846.14,12113.86 10935,12025 10935,10230 11065,10100 P7.10@11500,10100
SPK_5: P7.12 R13_3.1 R15_3.1 | length 2368.3
  Top Layer w33: R15_3.1@10630,11396.42 R13_3.1@10630,11478.86 10746.14,11478.86 10803.54,11421.46 10803.54,10120.87 11024.42,9900 P7.12@11500,9900
SPK_6: P7.14 R14_4.1 R16_4.1 | length 1594.7
  Top Layer w33: R16_4.1@10630,8729.32 R14_4.1@10630,8806.76 10630,9280 11050,9700 P7.14@11500,9700
SPK_7: P7.18 R13_4.1 R15_4.1 | length 1809.3
  Top Layer w33: R15_4.1@10630,8089.32 R13_4.1@10630,8171.76 10766.76,8171.76 11060,8465 11060,9130 11230,9300 P7.18@11500,9300
SPK_8: P8.23 R14_5.1 R16_5.1 | length 6206.8
  Top Layer w33: R16_5.1@10630,5422.22 R14_5.1@10630,5499.66 10630,5500.12 11665,6535.12 11665,10670 11895,10900 P8.23@12100,10900
SPK_9: P8.21 R13_5.1 R15_5.1 | length 6737.4
  Top Layer w33: R15_5.1@10630,4782.22 R13_5.1@10630,4864.66 10854.66,4864.66 11800,5810 11800,10535 11965,10700 P8.21@12100,10700
SPK_10: P8.19 R14_6.1 R16_6.1 | length 9052.4
  Top Layer w33: R16_6.1@10630,2115.12 R14_6.1@10630,2192.56 10630,2193.02 11940,3503.02 11940,10440 12000,10500 P8.19@12100,10500
SPK_11: P8.17 R13_6.1 R15_6.1 | length 10042.7
  Top Layer w33: R15_6.1@10630,1475.12 R13_6.1@10630,1557.56 10822.56,1557.56 12515,3250 12515,10145 12360,10300 P8.17@12100,10300
pads on no net: P7.15 P7.16 P7.20 P7.21 P7.22 P7.23 P7.24 P8.2 P8.3 P8.4 P8.5 P8.6 P8.7 P8.8 U1_1.4 U1_2.4 U1_3.4 U1_4.4 U1_5.4 U1_6.4 U2_1.4 U2_2.4 U2_3.4 U2_4.4 U2_5.4 U2_6.4

## Polygon pours and split planes (outlines as drawn)
5V5 on Top Layer "Top Layer-5V5" (solid, pour order 5): 7650,1730 7850,1730 7850,1760 7850,2325 6120,2325 6120,4210 6120,4405 6120,4935 6120,5070 6120,5180 7860,5180 7860,5625 6120,5625 6120,7575 6120,7705 6120,8245 6120,8365 6120,8550 7855,8550 7855,8930 6115,8930 6115,10885 6115,11035 6115,11555 6115,11675 6115,11885 6120,11880 7865,11880 7865,12225 7860,12230 6125,12230 6125,14190 6125,14325 6125,14855 6125,14980 6125,15145 7845,15145 7845,15500 6120,15500 6120,17465 6120,17627.5 6120,18160 6120,18295 6120,18390 7875,18390 7875,18865 6120,18865 6120,19425.23 5050,19424.77 5050,1730
GND on Top Layer "GND_L01_P021" (solid, pour order 21): 1000,1000 12995,1000 12995,19500 1000,19500
1V4 on Top Layer "1V4_L01_P000" (solid, pour order 0): 4155,19425 4155,18660 1825,18660 1825,18185 1830.68,18185 3705,18185 3705,15470 1850,15470 1850,15000 3705,15000 3705,12195 1825,12195 1825,11680 3710,11680 3710,8760 1825,8760 1825,8360 3725,8360 3725,5460 1805,5460 1805,5065 3725,5065 3725,2185 1825,2185 1825,1725 4550,1725 4550,19425
GND on Bottom Layer "GND_L02_P006" (solid, pour order 6): 1000,1000 12995,1000 12995,19500 1000,19500

## Silkscreen, mask and mechanical layers (free items; w line width, h text height)
Top Overlay:
  text "GND" at 4030,19220 h60 r90
  text "GND" at 4935,19220 h60 r90
  text "GND" at 9255,19215 h60 r90
  text "3V3" at 9655,19215 h60 r90
  text "V_OSC" at 4430,19110 h60 r90
  text "V_SPK" at 5330,19105 h60 r90
  text "UCSD NeuroMother Ver.A" at 12275,14910 h60 r90